# Altium PCB mew-0.2.1-full-tsc.pcbdoc (part 1 of 2)
Units mil, origin at the board's own origin, x right, y up, seen from the top; angles counter-clockwise.
Board outline 3463 x 2680.79 mil, 2 copper layers (Top Layer, Bottom Layer); 49 components, 103 nets, 267 pads, 123 vias.
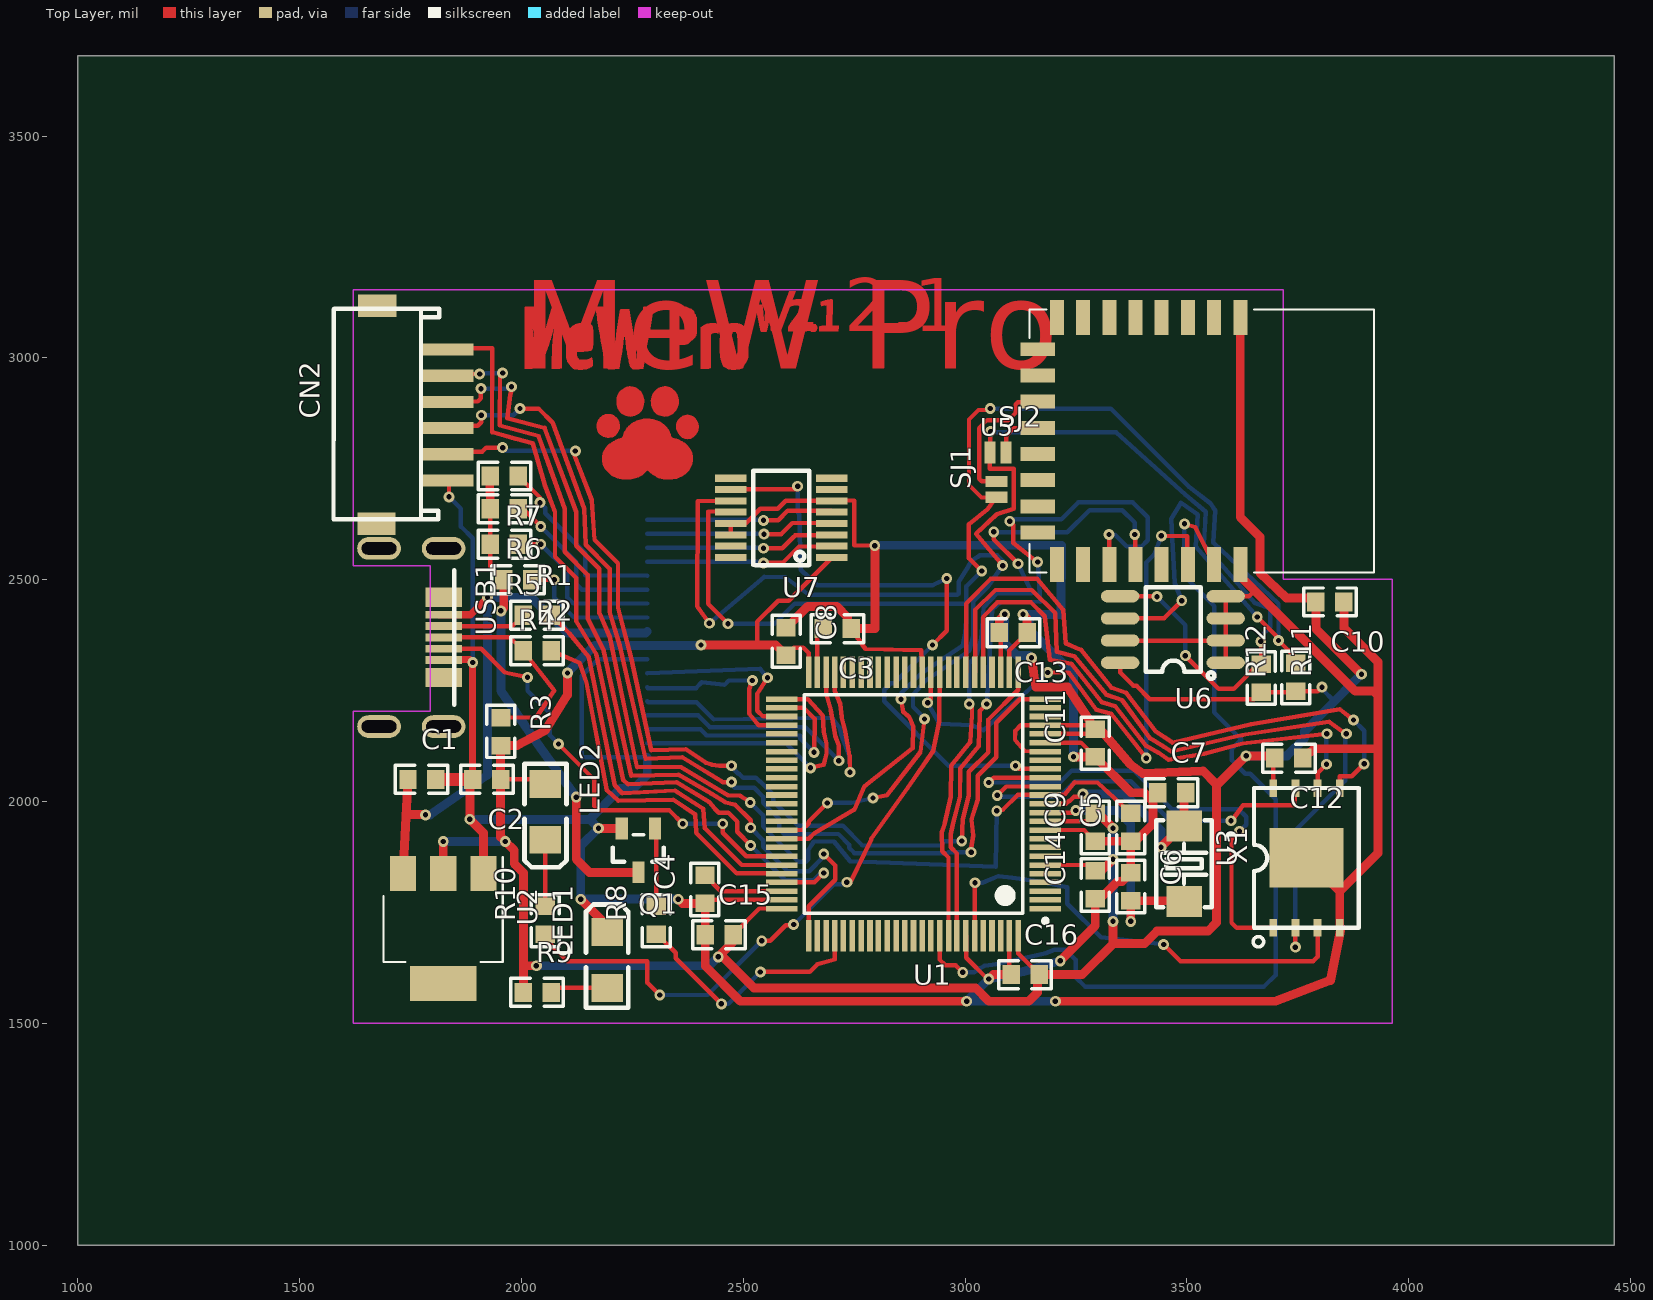
[diagram p0: Top Layer view]
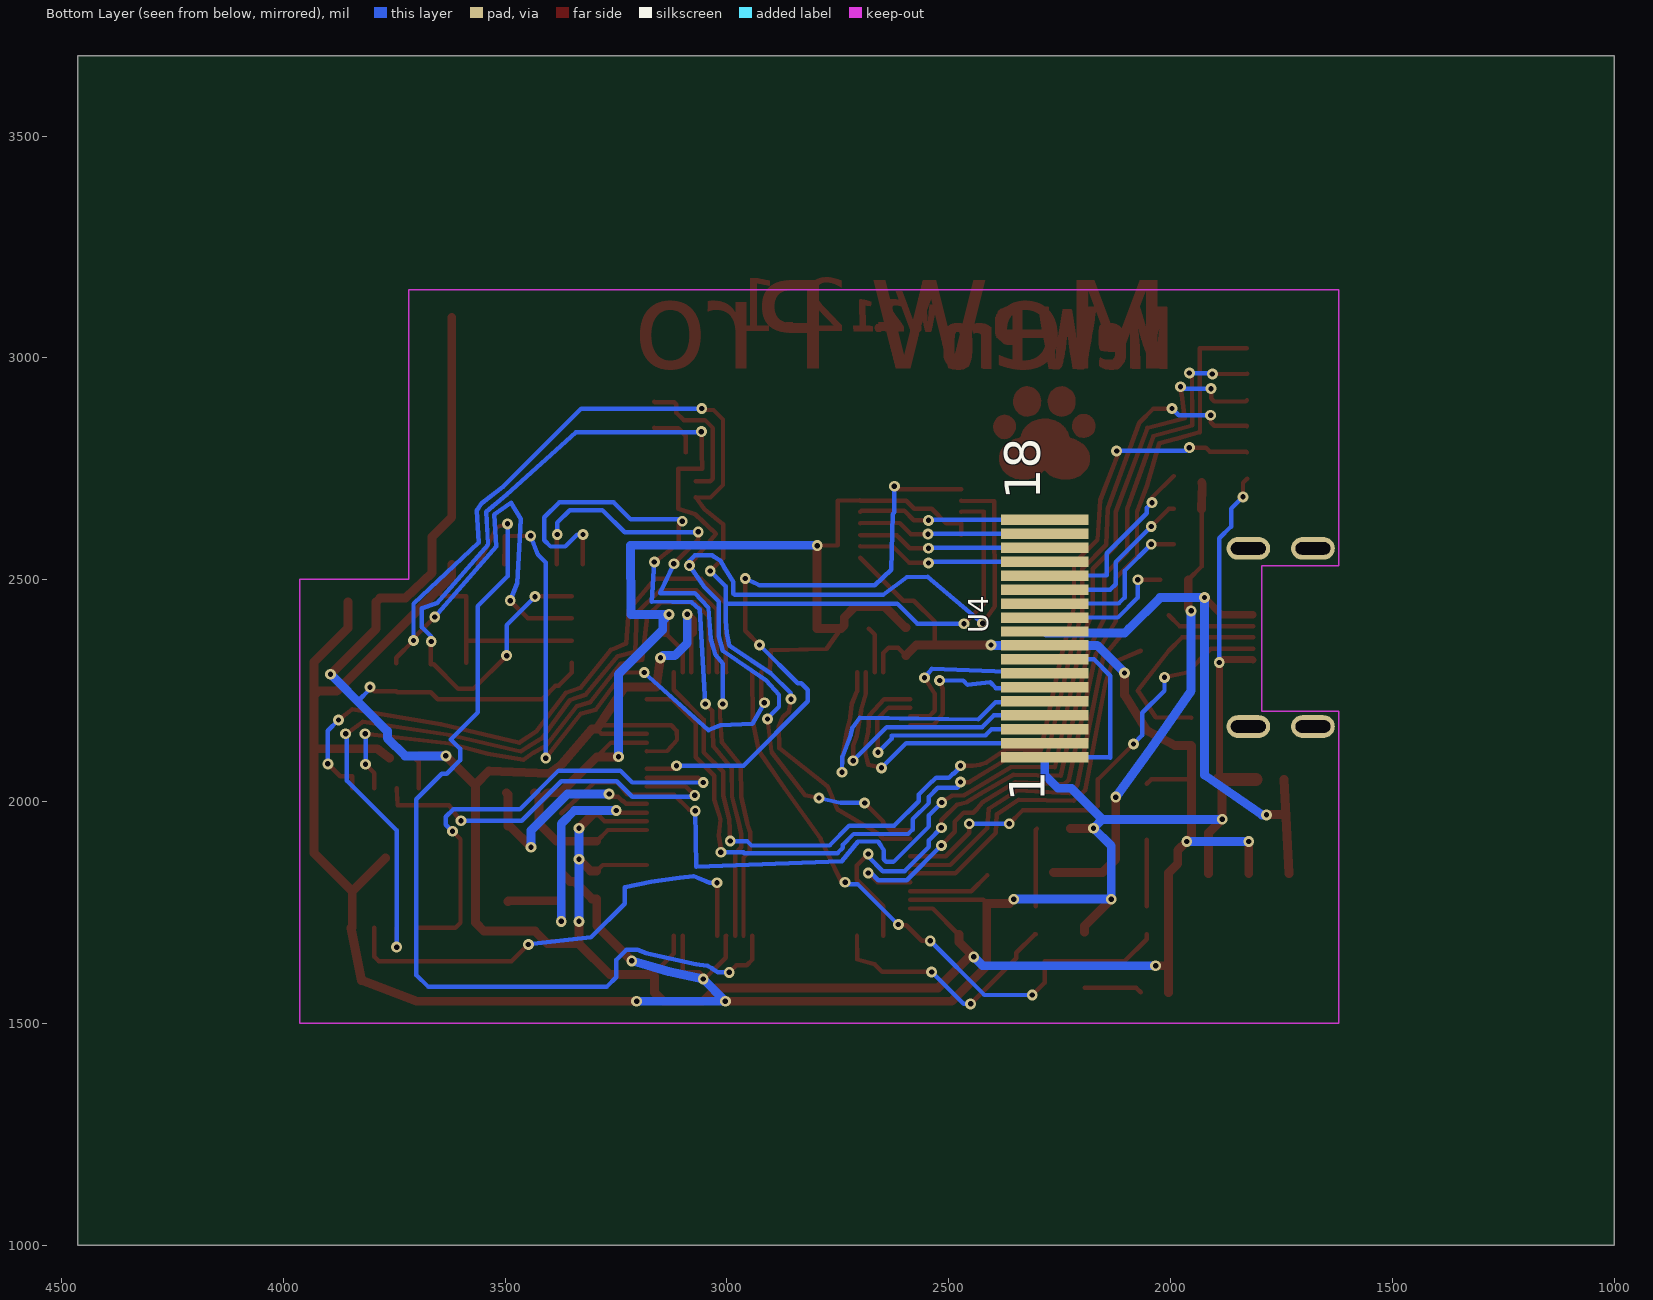
[diagram p1: Bottom Layer view, seen from below]

## Layer stack, top to bottom
Top Layer: signal copper (thickness not stored)
Dielectric: dielectric 12.6, FR-4, Dk 4.8
Bottom Layer: signal copper (thickness not stored)

## Board outline
4463,1000 1000,1000 1000,3680.79 4463,3680.79

## Components (designator, comment, footprint, x,y, rotation, side; value= is the part's Value field where it differs from the comment)
C1 "1u" 0603 1743.5,2049.8 r0 top
C2 "1u" 0603 1953.5,2049.8 r180 top
C3 "2u2" 0603 2743.5,2389.8 r180 top
C4 "2u2" 0603 2413.5,1769.8 r90 top
C5 "0.1u" 0603 3373.5,1909.8 r90 top
C6 "22pf" 0603 3373.5,1839.8 r270 top
C7 "22pf" 0603 3433.5,2019.8 r0 top
C8 "1u" 0603 2596.5,2392.8 r270 top
C9 "1u" 0603 3293.5,1909.8 r90 top
C10 "1u" 0603 3854.5,2449.8 r180 top
C11 "1u" 0603 3293.5,2099.8 r90 top
C12 "1u" 0603 3761.5,2097.8 r180 top
C13 "1u" 0603 3140.5,2380.8 r180 top
C14 "1u" 0603 3293.5,1779.8 r90 top
C15 "1u" 0603 2413.5,1699.8 r0 top
C16 "1u" 0603 3103.5,1609.8 r0 top
CN2 "1.5-6P" 1.5T-6P 1832.5,2782.8 r90 top
LED1 "KT-1206Red LED" LED-1206#1 2183.5,1659.8 r90 top
LED2 "KT-1206Red LED" LED-1206#2 2063.5,1959.8 r270 top
Q1 "2N7002K" SOT-23(SOT-23-3) 2263.5,1839.8 r180 top
R1 "22" 0603 2003.5,2419.8 r0 top
R2 "22" 0603 2003.5,2339.8 r0 top
R3 "1k5" 0603 1953.5,2189.8 r270 top
R4 "55" 0603 2023.5,2499.8 r180 top
R5 "55" 0603 1993.5,2579.8 r180 top
R6 "55" 0603 1993.5,2659.8 r180 top
R7 "55" 0603 1993.5,2733.8 r180 top
R8 "33" 0603 2303.5,1699.8 r90 top
R9 "1k" 0603 2003.5,1569.8 r0 top
R10 "1k" 0603 2053.5,1699.8 r90 top
R11 "1k5" 0603 3667.5,2309.8 r270 top
R12 "1k5" 0603 3745.5,2247.8 r90 top
SJ1 "JUMPER-PAD-2-NO" PAD-JUMPER-2-NO_NO_SILK 3070.5,2703.8 r90 top
SJ2 "JUMPER-PAD-2-NO" PAD-JUMPER-2-NO_NO_SILK 3074.5,2786.8 r0 top
U1 "STM32F437VGT6" STM-LQFP100 2883.6,1999.7 r180 top
U2 "AMS1117-3.3" SOT-223 1823.5,1589.8 r270 top
U3 "W25N01GVZEIG TR" WSON-8X6 3769.5,1872.8 r90 top
U4 "spi tft screen generic 0.8mm pitch smd" "SMD TFT 18PIN 0.8MM" 2283.5,2099.8 r270 bottom
U5 "JDY-08 BLE" JDY-08_HANDSOLDERING 3620.4,3091.2 r180 top
U6 "FM24C16B-GTR" SOIC-8_150MIL 3562.5,2312.8 r180 top
U7 "TSC2007IPWR" TSSOP-16 2587.5,2642.8 r180 top
USB1 "Micro USB-B 5P-Female-SMT_C40940" "MICRO 5P_C40940" 1824.5,2369.8 r270 top
X1 "8MHz" 5032 3493.5,1859.8 r270 top
? "" IMAGE#1 2285.7,2833.82 r0 top
? "v. 2.1" "TrueType Text"#1 2527.47,3060.79 r0 top
? "MeW Pro" "TrueType Text"#1 2000.47,2976.82 r0 top
? "" IMAGE#2 2284.3,2830.89 r0 top
? "MeW Pro" "TrueType Text"#2 2001.47,2975.82 r0 top
? "v. 2.1" "TrueType Text"#3 2526.5,3059.79 r0 top

## Footprints (in the part's own frame and the unit in brackets; to place one, negate y for a bottom-side part, rotate by r counter-clockwise, add the part's x,y. Pads: shape width x height; smd on the part's side, far side on the other; paste and mask are expansions set on the pad)
1.5T-6P [mm]
  rect 0.701x3 smd: 1(-1.502,0.003) 2(0,0) 3(1.499,0) 4(2.987,-0.001) 5(4.497,0.003) 6(5.998,0.003)
  rect 1.3x2.2 smd: 7(8.508,4.007) 8(-3.986,4.049)
  silkscreen extent -3.72,0.46 8.33,6.51
0603 [mm]
  rect 1x1.1 smd: 1(0.015,-0.001) 2(1.615,-0.001)
  silkscreen extent -0.7,-0.8 2.3,0.8
5032 [mil]
  rect 70x80 smd: 1(-85,0) 2(85,0)
  silkscreen extent -98,-63 98,63
IMAGE#1 [mil]
IMAGE#2 [mil]
  Top Layer region: 48.13,-104.98 48.13,-104.98 43.55,-104.94 39.1,-104.68 34.92,-104.21 31.15,-103.52 27.92,-102.6 25.32,-101.63 22.8,-100.58 20.36,-99.43 17.99,-98.19 15.7,-96.87 13.48,-95.45 11.33,-93.94 9.25,-92.33 7.23,-90.63 5.28,-88.84 0.05,-83.82 93.45,-83.82 92.49,-85.25 85.97,-91.84 77.92,-97.48 68.4,-101.99 65.15,-103 61.36,-103.81 57.17,-104.41 52.72,-104.8
  Top Layer region: -47.8,-104.83 -47.8,-104.83 -53.45,-104.62 -58.71,-104.1 -63.63,-103.24 -68.23,-102.04 -72.55,-100.48 -76.64,-98.54 -80.51,-96.21 -84.21,-93.48 -87.78,-90.32 -91.24,-86.73 -93.59,-83.99 -93.72,-83.82 0.05,-83.82 -5.17,-88.84 -8.83,-92.14 -12.51,-95.02 -16.25,-97.49 -20.1,-99.58 -24.1,-101.29 -28.28,-102.65 -32.71,-103.66 -37.4,-104.35 -42.42,-104.74
  Top Layer region: 93.45,-83.82 -93.72,-83.82 -95.62,-81.36 -97.34,-78.78 -98.76,-76.22 -99.92,-73.61 -100.82,-70.92 -101.49,-68.09 -101.94,-65.07 -102.2,-61.82 -102.28,-58.29 -102.2,-54.7 -101.93,-51.4 -101.47,-48.35 -100.77,-45.49 -99.83,-42.76 -98.63,-40.12 -97.13,-37.5 -95.32,-34.85 -93.19,-32.13 -90.69,-29.26 -88.52,-27.06 -86.05,-24.88 -83.34,-22.75 -80.46,-20.72 -77.47,-18.83 -74.43,-17.11 -71.42,-15.6 -68.5,-14.35 -67.06,-13.85 -67.06,-13.85 -65.72,-13.38 -63.16,-12.75 -61.67,-12.44 -60.36,-12.08 -59.22,-11.68 -58.25,-11.24 -57.46,-10.75 -57.21,-10.54 -56.79,-10.19 -56.3,-9.58 -55.94,-8.9 -55.74,-8.17 -55.66,-7.36 -55.49,-6.02 -55.02,-4.31 -54.28,-2.31 -53.33,-0.11 -52.19,2.22 -50.91,4.6 -49.53,6.95 -48.09,9.2 -46.63,11.26 -45.19,13.05 -42.42,16.02 -39.42,18.77 -36.21,21.29 -32.82,23.57 -29.27,25.6 -25.57,27.37 -21.73,28.87 -17.79,30.09 -13.75,31.02 -9.64,31.65 -2.01,32.12 -2.01,32.12 5.41,31.75 12.54,30.57 19.34,28.61 25.73,25.9 31.65,22.47 37.04,18.36 41.84,13.6 45.98,8.21 49.41,2.24 49.81,1.37 50.22,0.45 50.62,-0.51 51.01,-1.49 51.37,-2.48 51.72,-3.44 52.02,-4.37 52.29,-5.25 52.51,-6.05 52.67,-6.76 52.91,-7.79 53.18,-8.64 53.52,-9.35 53.99,-9.94 54.64,-10.45 55.5,-10.9 56.62,-11.33 58.05,-11.76 59.84,-12.22 62.03,-12.75 65.36,-13.63 68.63,-14.7 71.81,-15.95 74.88,-17.36 77.84,-18.93 80.67,-20.65 83.35,-22.51 85.87,-24.5 88.22,-26.62 90.38,-28.85 96.19,-36.68 100.07,-44.9 102.08,-53.33 102.26,-61.77 100.69,-70.03 97.41,-77.92
  Top Layer region: 90.66,-13.85 90.66,-13.85 90.66,-13.85 84.19,-13.22 77.86,-10.54 71.98,-5.61 68.69,-1.22 66.36,3.55 64.97,8.55 64.48,13.65 64.88,18.7 66.14,23.56 68.23,28.1 71.14,32.17 74.85,35.64 77.11,37.01 79.32,38.35 83.47,39.86 87.71,40.55 87.71,40.55 91.94,40.47 96.08,39.66 100.02,38.16 103.69,36.03 106.99,33.29 109.83,30 112.11,26.19 113.76,21.91 115.01,13.93 114.22,6.56 111.71,0.02 107.79,-5.5 102.77,-9.78 96.96,-12.64
  Top Layer region: -86.12,-10.75 -86.12,-10.75 -90.94,-10.74 -95.47,-9.99 -99.66,-8.55 -103.45,-6.47 -106.79,-3.8 -109.63,-0.58 -111.92,3.13 -113.62,7.29 -114.66,11.85 -115.01,16.77 -114.71,19.91 -113.88,23.1 -112.59,26.27 -110.88,29.35 -108.82,32.27 -106.45,34.95 -103.85,37.32 -101.07,39.31 -98.16,40.85 -95.18,41.85 -93.37,42.21 -91.5,42.43 -89.59,42.53 -89.59,42.53 -87.65,42.5 -85.72,42.35 -83.81,42.07 -81.95,41.68 -80.16,41.17 -78.46,40.54 -76.88,39.81 -72.9,37.01 -70.72,35.48 -66.31,30.05 -63.58,23.87 -62.47,17.3 -62.91,10.68 -64.83,4.38 -68.18,-1.27 -72.88,-5.91 -78.89,-9.19
  Top Layer region: -39.39,36.98 -39.39,36.98 -44.61,37.37 -49.47,38.55 -53.94,40.47 -57.97,43.08 -61.5,46.33 -64.49,50.17 -66.9,54.54 -68.68,59.4 -69.78,64.7 -70.16,70.38 -69.91,75.15 -69.16,79.66 -67.94,83.89 -66.25,87.83 -64.12,91.44 -61.55,94.71 -58.55,97.62 -55.16,100.15 -51.37,102.27 -47.2,103.96 -45.59,104.36 -43.67,104.62 -41.51,104.72 -41.51,104.72 -39.2,104.68 -36.8,104.52 -34.39,104.22 -32.05,103.8 -29.83,103.28 -27.83,102.65 -26.11,101.92 -22.8,100.02 -19.8,97.79 -17.11,95.26 -14.75,92.43 -12.72,89.33 -11.03,85.98 -9.71,82.39 -8.75,78.58 -8.16,74.57 -7.97,70.38 -8.36,64.75 -9.49,59.49 -11.31,54.65 -13.78,50.29 -16.84,46.45 -20.45,43.2 -24.56,40.57 -29.12,38.62 -34.08,37.41
  Top Layer region: 38.82,37.01 38.82,37.01 33.82,37.38 29.12,38.46 24.78,40.21 20.83,42.6 17.32,45.57 14.27,49.1 11.74,53.15 9.76,57.66 8.37,62.61 7.61,67.95 7.53,72.68 8.01,77.26 9.02,81.64 10.54,85.79 12.54,89.66 14.99,93.2 17.87,96.38 21.15,99.14 24.81,101.46 28.82,103.27 33.11,104.48 37.46,104.98 37.46,104.98 41.8,104.79 46.07,103.96 50.2,102.52 54.11,100.48 57.75,97.88 61.03,94.76 63.89,91.14 66.25,87.05 67.97,82.95 69.18,78.77 69.89,74.56 70.11,70.34 69.85,66.16 69.1,62.06 67.87,58.09 66.17,54.27 64,50.65 61.37,47.27 59.4,45.16 57.43,43.32 55.45,41.74 53.42,40.42 51.31,39.32 49.12,38.46 46.79,37.81 44.32,37.35 41.67,37.09
JDY-08_HANDSOLDERING [mm]
  rect 0.8x2 smd: 1(0,0) 2(1.5,0) 3(3,0) 4(4.5,0) 5(6,0) 6(7.5,0) 7(9,0) 8(10.5,0) 17(10.5,14.14) 18(9,14.14) 19(7.5,14.14) 20(6,14.14) 21(4.5,14.14) 22(3,14.14) 23(1.5,14.14) 24(0,14.14)
  rect 2x0.8 smd: 9(11.6,1.82) 10(11.6,3.32) 11(11.6,4.82) 12(11.6,6.32) 13(11.6,7.82) 14(11.6,9.32) 15(11.6,10.82) 16(11.6,12.32)
  silkscreen extent -7.66,-0.46 12.06,14.6
LED-1206#1 [mil]
  rect 63x70.9 smd: 1(-80,-10.05) 2(46,-10.05)
  silkscreen extent -125,-57 108,38
LED-1206#2 [mil]
  rect 63x70.9 smd: 1(-80,-9.95) 2(46,-9.95)
  silkscreen extent -125,-57 108,38
"MICRO 5P_C40940" [mm]
  oval 1.3x2.5 hole 0.7 slot 2.001 at 90 deg: 0(-5.1,0) 0(-5.1,-3.701) 0(5.1,0) 0(5.1,-3.701)
  rect 0.45x2.1 smd: 1(-1.302,0.009) 2(-0.652,0.009) 3(0.001,0.009) 4(0.649,0.009) 5(1.299,0.009)
  rect 1.1x2.1 smd: ""(-2.3,0.009) ""(2.3,0.009)
  silkscreen extent -3.84,0.61 3.86,0.61
PAD-JUMPER-2-NO_NO_SILK [mil]
  rect 25x50 smd: 1(-18,0) 2(18,0)
"SMD TFT 18PIN 0.8MM" [mm]
  rect 0.6x5 smd: 1(0,0) 2(-0.8,0) 3(-1.6,0) 4(-2.4,0) 5(-3.2,0) 6(-4,0) 7(-4.801,0) 8(-5.601,0) 9(-6.401,0) 10(-7.2,0) 11(-8,0) 12(-8.8,0) 13(-9.6,0) 14(-10.4,0) 15(-11.2,0) 16(-11.999,0) 17(-12.799,0) 18(-13.599,0)
SOIC-8_150MIL [mm]
  oval 2.2x0.7 smd: 1(-0.635,0) 2(-0.635,-1.27) 3(-0.635,-2.54) 4(-0.635,-3.81) 5(5.41,-3.81) 6(5.41,-2.54) 7(5.41,-1.27) 8(5.41,0)
  silkscreen extent 0.01,-4.32 3.94,0.93
SOT-23(SOT-23-3) [mm]
  rect 0.7x1.25 smd: 1(-0.95,-2.52) 2(0.95,-2.52) 3(0,-0.02)
  silkscreen extent -1.46,-2.17 1.46,-0.62
SOT-223 [mm]
  rect 2x1.5 smd: 1(-6.3,2.3) 2(-6.3,0) 3(-6.3,-2.3)
  rect 2x3.8 smd: 4(0,0)
  silkscreen extent -7.25,-3.41 -1.24,3.41
STM-LQFP100 [mil]
  rect 71.5x12.5 smd: 1(-297.05,241.05) 2(-297.05,221.05) 3(-297.05,202.05) 4(-297.05,182.05) 5(-297.05,162.05) 6(-297.05,143.05) 7(-297.05,123.05) 8(-297.05,103.05) 9(-297.05,84.05) 10(-297.05,64.05) 11(-297.05,44.05) 12(-297.05,25.05) 13(-297.05,5.05) 14(-297.05,-14.95) 15(-297.05,-33.95) 16(-297.05,-53.95) 17(-297.05,-73.95) 18(-297.05,-92.95) 19(-297.05,-112.95) 20(-297.05,-132.95) 21(-297.05,-152.95) 22(-297.05,-171.95) 23(-297.05,-191.95) 24(-297.05,-211.95) 25(-297.05,-230.95) 51(296.95,-230.95) 52(296.95,-211.95) 53(296.95,-191.95) 54(296.95,-171.95) 55(296.95,-152.95) 56(296.95,-132.95) 57(296.95,-112.95) 58(296.95,-92.95) 59(296.95,-73.95) 60(296.95,-53.95) 61(296.95,-33.95) 62(296.95,-14.95) 63(296.95,5.05) 64(296.95,25.05) 65(296.95,44.05) 66(296.95,64.05) 67(296.95,84.05) 68(296.95,103.05) 69(296.95,123.05) 70(296.95,143.05) 71(296.95,162.05) 72(296.95,182.05) 73(296.95,202.05) 74(296.95,221.05) 75(296.95,241.05)
  rect 12.5x71.5 smd: 26(-236.05,-291.95) 27(-216.05,-291.95) 28(-197.05,-291.95) 29(-177.05,-291.95) 30(-157.05,-291.95) 31(-138.05,-291.95) 32(-118.05,-291.95) 33(-98.05,-291.95) 34(-79.05,-291.95) 35(-59.05,-291.95) 36(-39.05,-291.95) 37(-20.05,-291.95) 38(-0.05,-291.95) 39(19.95,-291.95) 40(38.95,-291.95) 41(58.95,-291.95) 42(78.95,-291.95) 43(97.95,-291.95) 44(117.95,-291.95) 45(137.95,-291.95) 46(157.95,-291.95) 47(176.95,-291.95) 48(196.95,-291.95) 49(216.95,-291.95) 50(235.95,-291.95) 76(235.95,302.05) 77(216.95,302.05) 78(196.95,302.05) 79(176.95,302.05) 80(157.95,302.05) 81(137.95,302.05) 82(117.95,302.05) 83(97.95,302.05) 84(78.95,302.05) 85(58.95,302.05) 86(38.95,302.05) 87(19.95,302.05) 88(-0.05,302.05) 89(-20.05,302.05) 90(-39.05,302.05) 91(-59.05,302.05) 92(-79.05,302.05) 93(-98.05,302.05) 94(-118.05,302.05) 95(-138.05,302.05) 96(-157.05,302.05) 97(-177.05,302.05) 98(-197.05,302.05) 99(-216.05,302.05) 100(-236.05,302.05)
  silkscreen extent -302,-241 246,274
"TrueType Text"#1 [mil]
"TrueType Text"#2 [mil]
  Top Layer region: 477.41,-2.01 477.41,-2.01 473.4,-2 471.6,-1.98 469.48,-1.91 467.74,-1.76 466.26,-1.52 464.94,-1.17 463.67,-0.67 462.33,-0.01 460.81,0.83 459.01,1.89 457.22,2.96 455.77,3.88 454.59,4.75 453.63,5.66 452.83,6.7 452.12,7.96 451.46,9.53 450.78,11.49 450.01,13.95 449.29,16.39 505.9,16.39 504.31,13.78 502.11,10.39 499.9,7.03 498.03,4.34 496.34,2.24 494.7,0.67 493.65,-0.01 492.95,-0.46 490.95,-1.22 488.54,-1.68 485.58,-1.91 481.92,-2
  Top Layer region: 130.41,-2.01 130.41,-2.01 126.24,-2 123.03,-1.93 120.34,-1.73 118.14,-1.35 117.14,-1.01 116.29,-0.72 115.04,-0.01 114.65,0.21 113.08,1.52 111.44,3.26 109.6,5.5 107.41,8.29 105.25,11.11 103.51,13.53 102.16,15.77 101.14,18.07 100.71,19.59 158.48,19.59 158.59,18.84 158.7,17.67 158.75,16.68 158.8,14.73 158.81,8.81 158.75,7.53 158.6,6.49 158.3,5.63 157.8,4.9 157.06,4.25 156.04,3.61 154.67,2.95 152.91,2.19 150.71,1.29 148.51,0.39 147.46,-0.01 146.66,-0.32 145.06,-0.88 144.6,-1.01 143.58,-1.3 142.1,-1.6 140.5,-1.8 138.65,-1.92 136.6,-1.98 134.79,-2
  Top Layer region: 253.61,-1.21 253.61,-1.21 250.98,-1.17 250.15,-1.11 249.44,-0.98 248.89,-0.81 248.33,-0.52 247.79,-0.11 247.22,0.43 246.58,1.12 245.81,1.99 245.05,2.86 244.44,3.6 243.94,4.26 243.54,4.89 243.21,5.56 242.93,6.32 242.68,7.23 242.42,8.34 242.14,9.71 241.81,11.39 240.78,16.39 240.11,19.59 239.49,22.59 276.89,22.59 276.37,19.59 273.01,-0.01 271.49,-0.17 270.25,-0.31 269.22,-0.41 268.37,-0.5 267.45,-0.59 266.42,-0.67 265.31,-0.76 264.36,-0.83 263.21,-0.91 262.19,-0.98 261.12,-1.06 260.31,-1.11 259.58,-1.15 258.12,-1.19
  Top Layer region: 197.61,-1.01 197.61,-1.01 195.54,-0.98 194.61,-0.89 194.06,-0.76 193.58,-0.57 193.1,-0.28 192.6,0.16 192.07,0.73 191.45,1.47 190.71,2.39 189.98,3.32 189.39,4.09 188.91,4.77 188.52,5.41 188.2,6.06 187.93,6.78 187.68,7.62 187.42,8.63 187.14,9.87 186.81,11.39 185.67,16.91 185.12,19.59 184.71,21.6 184.51,22.59 222.58,22.59 218.81,-0.01 216.15,-0.28 213.94,-0.5 212.07,-0.67 210.4,-0.8 208.81,-0.89 207.18,-0.95 205.38,-0.98 203.26,-1
  Top Layer region: 158.48,19.59 135.81,19.59 138.43,19.59 140.59,19.63 142.43,19.74 144.08,19.95 145.66,20.29 147.31,20.8 149.13,21.51 151.28,22.46 153.86,23.67 157.01,25.19 157.01,25.19 157.5,23.55 157.89,22.19 158.2,21.01 158.35,20.29
  Top Layer region: 332.21,-0.01 332.21,-0.01 332.21,53.99 354.41,53.99 354.41,6.06 354.39,2.52 354.25,1.89 353.98,1.52 353.7,1.29 353.46,1.12 353.14,0.9 352.71,0.67 352.28,0.53 351.63,0.43 350.55,0.34 349.61,0.29 348.41,0.24 346.91,0.19 345.41,0.13 344.16,0.09 343.05,0.06 342.01,0.03 339.78,0
  Top Layer region: 135.81,19.59 100.71,19.59 100.41,20.63 99.93,23.68 99.63,27.43 99.48,32.13 99.42,37.97 99.43,52.84 99.45,55.59 160.06,55.59 160.03,55.04 159.86,52.79 159.61,50.73 159.25,48.69 158.78,46.5 158.17,43.99 157.41,40.99 154.3,40.34 151.66,39.81 149.29,39.4 146.98,39.08 144.51,38.84 141.69,38.66 138.3,38.52 134.12,38.4 128.97,38.3 122.61,38.19 122.78,35.42 122.93,33.18 123.08,31.37 123.26,29.92 123.49,28.74 123.78,27.73 124.16,26.82 124.64,25.92 125.25,24.94 126.01,23.79 126.78,22.65 127.44,21.74 128.04,21.03 128.66,20.5 129.34,20.11 130.15,19.86 131.14,19.7 132.2,19.63 133.84,19.59
  Top Layer region: 50.81,33.39 41.61,33.39 34.16,55.59 32.21,61.39 31.45,63.69 30.79,65.72 30.19,67.69 29.57,69.82 29.47,70.19 65.51,70.19 65.28,69.39 64.65,67.31 64.04,65.43 63.38,63.53 62.61,61.39 60.52,55.59 53.06,34.91 52.95,34.56 52.8,34.11 52.7,33.87 52.47,33.59 52.01,33.43
  Top Layer region: 356.01,53.99 332.21,53.99 332.21,74.59 392.17,74.59 391.7,73.42 390.34,71.23 388.54,69.07 386.21,66.72 383.31,63.99 380.4,61.28 377.96,59.11 375.84,57.42 373.86,56.15 372.64,55.59 371.88,55.24 369.71,54.63 367.21,54.26 364.2,54.07 360.52,54
  Top Layer region: 402.61,-0.01 402.61,-0.01 402.61,80.79 434.21,80.79 433.06,80.78 432.15,80.69 431.51,80.53 431,80.38 430.47,80.21 429.81,79.99 429.16,79.77 428.73,79.62 428.24,79.44 427.8,79.26 427.47,79.09 427.14,78.89 426.79,78.66 426.41,78.38 425.96,78.02 425.41,77.59 425.35,55.59 425.26,19.59 425.22,5.66 425.19,2.52 425.05,1.89 424.78,1.52 424.5,1.29 424.26,1.12 423.94,0.9 423.51,0.67 423.08,0.53 422.43,0.43 421.35,0.34 420.41,0.29 419.21,0.24 417.71,0.19 416.21,0.13 414.95,0.09 413.84,0.06 411.7,0.01 409.07,-0.01
  Top Layer region: 441.61,79.19 441.61,79.19 440.74,79.62 440.02,79.97 439.4,80.24 438.84,80.44 438.29,80.59 437.69,80.69 436.51,80.77 434.21,80.79 442.18,80.79 442.18,80.79
  Top Layer region: 160.06,55.59 122.61,55.59 128.11,55.6 130.08,55.64 131.64,55.7 132.89,55.81 133.92,55.98 134.81,56.21 135.67,56.51 136.57,56.9 137.61,57.39 137.88,58.21 138.1,58.91 138.27,59.56 138.4,60.21 138.49,61.01 138.57,62.28 138.61,64.66 138.6,72.71 138.55,74.63 138.47,75.84 138.39,76.51 138.27,77.19 138.13,77.74 137.9,78.4 137.59,79.09 137.21,79.89 136.83,80.67 136.5,81.3 136.19,81.79 135.86,82.16 135.49,82.43 135,82.61 134.48,82.71 133.78,82.77 131.81,82.79 160.07,82.79 160.07,82.79 160.18,78.58 160.2,73.91 160.21,65.72 160.19,60.81 160.14,57.66
  Top Layer region: 122.61,55.59 99.45,55.59 99.48,57.66 99.54,60.51 99.71,63.87 100,66.71 100.43,69.25 101.03,71.7 101.82,74.26 102.84,77.15 103.6,79.19 104.11,80.59 104.94,82.79 104.94,82.79 131.81,82.79 131.27,82.79 129.55,82.74 128.74,82.61 128.07,82.37 127.53,81.96 127.05,81.36 126.62,80.53 126.26,79.62 126.1,79.19 125.69,77.98 125.11,76.19 124.54,74.39 124.09,72.86 123.72,71.47 123.44,70.12 123.23,68.66 123.06,66.99 122.93,64.97 122.83,62.47 122.72,59.39
  Top Layer region: 478.01,16.39 449.29,16.39 449.11,16.99 448.35,19.59 448.2,20.11 447.5,22.63 446.95,24.94 446.53,27.18 446.23,29.54 446.03,32.22 445.9,35.43 445.84,39.36 445.82,44.22 445.83,55.24 445.85,64.23 446.08,75.47 446.61,82.79 446.66,83.59 478.21,83.59 477.85,83.59 476.34,83.53 475.66,83.41 475.1,83.15 474.63,82.74 474.2,82.12 473.8,81.26 473.62,80.79 473.37,80.11 473.07,79.19 472.89,78.63 472.31,76.79 471.74,74.93 471.29,73.31 470.93,71.79 470.67,70.2 470.48,68.39 470.35,66.19 470.28,63.87 470.25,61.4 470.22,57.66 470.22,45.72 470.24,40.73 470.27,38.16 470.33,36.35 470.41,34.77 470.52,33.29 470.67,31.77 470.87,30.08 471.11,28.09 471.36,26.11 471.57,24.51 471.75,23.23 471.92,22.22 472.1,21.43 472.3,20.78 472.54,20.23 472.83,19.72 473.18,19.19 473.61,18.59 474.05,17.99 474.42,17.52 474.71,17.18 475,16.91 475.34,16.68 475.7,16.54 476.12,16.45 476.63,16.41
  Top Layer region: 505.9,16.39 478.01,16.39 479.61,16.45 480,16.54 480.31,16.68 480.63,16.91 480.9,17.18 481.21,17.57 481.58,18.07 482.01,18.69 482.45,19.32 482.8,19.87 483.09,20.4 483.34,20.97 483.55,21.64 483.75,22.46 483.95,23.5 484.16,24.81 484.41,26.45 484.71,28.49 485.01,30.54 485.25,32.26 485.44,33.81 485.58,35.29 485.68,36.85 485.74,38.62 485.78,40.73 485.81,44.43 485.8,59.28 485.77,62.47 485.72,64.43 485.67,65.89 485.6,67.11 485.51,68.4 485.38,70 485.21,71.89 485.05,73.76 484.91,75.28 484.78,76.49 484.64,77.45 484.49,78.23 484.31,78.87 484.08,79.43 483.8,79.96 483.45,80.53 483.01,81.19 482.58,81.84 482.21,82.36 481.88,82.77 481.55,83.07 481.21,83.29 480.8,83.44 480.23,83.53 479.08,83.59 478.21,83.59 506.43,83.59 506.67,82.79 506.91,81.99 507.81,78.99 508.52,76.46 509.08,74.22 509.5,72.09 509.8,69.86 510,67.37 510.12,64.43 510.18,61.4 510.2,58.21 510.21,43.33 510.15,37.13 510,32.13 509.7,28.09 509.2,24.76 508.46,21.92 507.44,19.3 506.07,16.68
  Top Layer region: 222.58,22.59 206.61,22.59 206.78,29.23 206.94,34.72 207.13,39.36 207.37,43.47 207.69,47.36 208.13,51.35 208.69,55.59 208.81,56.42 209.46,60.82 210.42,66.94 211.61,74.39 212.64,80.79 212.96,82.79 213.31,84.99 230.61,84.99 230.39,82.79 230.18,80.79 230.01,79.19 229.58,75 228.74,66.91 228.05,60.42 227.48,55.2 226.99,50.96 226.54,47.39 226.09,44.17 225.62,41.01 225.07,37.58 224.41,33.59
  Top Layer region: 257.41,22.59 239.49,22.59 237.21,33.59 236.4,37.69 235.72,41.2 235.15,44.43 234.63,47.68 234.14,51.26 233.63,55.49 233.06,60.67 232.39,67.11 231.59,75.11 231.19,79.19 231.03,80.79 230.83,82.79 230.61,84.99 249.76,84.99 250.15,82.79 250.5,80.79 250.78,79.19 251.61,74.39 252.54,69.05 253.29,64.57 253.91,60.64 254.43,56.96 254.6,55.59 254.89,53.21 255.31,49.09 255.75,44.27 256.22,38.46 256.76,31.33
  Top Layer region: 65.51,70.19 48.21,70.19 48.32,70.92 48.45,71.64 48.58,72.34 48.69,72.86 48.82,73.47 49.03,74.44 49.29,75.67 49.61,77.19 49.94,78.71 50.22,79.98 50.4,80.79 50.53,81.36 50.7,82.04 50.89,82.79 51.05,83.38 51.21,83.99 51.54,85.11 51.93,86.43 52.42,88.03 53.01,89.99 55.59,98.59 72.81,98.59 70.81,90.61 69.18,84.18 68.83,82.79 67.88,79.06 66.83,75.04 65.99,71.89
  Top Layer region: 6.01,-0.01 6.01,-0.01 6.01,98.59 22.41,98.59 21.81,98.19 21.86,97.91 22,97.18 22.11,96.52 22.21,95.93 22.33,95.23 22.47,94.34 22.65,93.2 22.88,91.76 23.16,89.94 23.51,87.69 23.87,85.43 24.15,83.59 24.27,82.79 24.4,81.88 24.62,80.34 24.81,78.78 25.01,77.07 25.22,75.09 25.47,72.7 25.76,69.77 26.11,66.19 26.47,62.6 26.75,59.63 26.97,57.13 27.13,54.92 27.25,52.84 27.33,50.73 27.37,48.69 27.4,45.72 27.41,38.59 27.74,19.59 27.98,6.06 28.01,3.61 27.94,2.24 27.75,1.78 27.49,1.52 27.15,1.29 26.87,1.12 26.48,0.9 26.35,0.83 25.99,0.67 25.53,0.53 24.87,0.43 23.79,0.34 22.86,0.29 21.68,0.24 20.21,0.19 18.74,0.13 17.51,0.09 16.43,0.06 15.42,0.03 13.26,0
  Top Layer region: 48.21,70.19 29.47,70.19 28.89,72.34 28.08,75.47 27.09,79.44 26.76,80.79 26.27,82.79 25.85,84.47 24.31,90.78 22.41,98.59 40.17,98.59 42.81,90.39 43.52,88.32 44.09,86.64 44.56,85.24 44.94,84.07 45.18,83.29 45.32,82.79 45.53,82.07 45.79,81.07 46.06,79.98 46.36,78.71 46.71,77.19 47.07,75.67 47.35,74.44 47.57,73.47 47.71,72.86 47.84,72.3 47.97,71.64 48.11,70.92
  Top Layer region: 66.61,-0.01 66.61,-0.01 67.12,19.59 67.61,38.39 67.72,42.25 67.82,45.42 67.91,48.08 68.01,50.37 68.13,52.48 68.27,54.55 68.45,56.77 68.68,59.28 68.96,62.27 69.31,65.89 69.67,69.5 69.96,72.45 70.2,74.85 70.41,76.85 70.6,78.58 70.79,80.15 70.99,81.71 71.14,82.79 71.25,83.59 71.49,85.3 71.81,87.59 72.14,89.87 72.4,91.71 72.61,93.17 72.78,94.32 72.91,95.21 73.02,95.93 73.12,96.52 73.23,97.18 73.36,97.91 73.41,98.19 72.81,98.59 89.41,98.59 89.41,6.06 89.39,2.52 89.25,1.89 88.98,1.52 88.7,1.29 88.41,1.09 88.03,0.83 87.7,0.67 87.27,0.53 86.61,0.43 85.52,0.34 84.55,0.29 83.33,0.24 81.81,0.19 80.29,0.13 79,0.09 77.88,0.06 75.71,0.01 73.07,-0.01
  Top Layer region: 160.07,82.79 104.94,82.79 105.4,84.01 106.47,86.77 107.41,88.99 108.29,90.75 109.18,92.16 110.15,93.33 111.29,94.36 112.67,95.34 114.35,96.38 116.41,97.59 118.48,98.78 120.21,99.74 121.69,100.48 123.05,101.04 124.39,101.44 125.82,101.71 127.44,101.87 129.38,101.95 131.73,101.98 134.61,101.99 134.61,101.99 141.55,101.96 147.11,101.73 151.43,101.11 154.68,99.9 157.01,97.91 158.58,94.95 159.52,90.81 160.01,85.3
  Top Layer region: 442.18,80.79 402.61,80.79 402.61,92.99 406.31,95.43 409.36,97.38 411.93,98.9 414.19,100.04 416.29,100.86 418.41,101.41 420.72,101.75 423.38,101.92 426.55,101.98 430.41,101.99 430.41,101.99 434.24,101.97 435.61,101.93 436.71,101.84 437.59,101.7 438.32,101.49 438.96,101.2 439.59,100.81 440.25,100.31 441.01,99.69 441.77,99.06 442.38,98.52 442.85,98.03 443.21,97.54 443.46,97 443.63,96.38 443.74,95.6 443.79,94.64 443.8,89.34 443.76,87.59 443.67,86.42 443.54,85.44 443.34,84.47 443.06,83.44 442.69,82.27 442.36,81.3
  Top Layer region: 506.43,83.59 446.66,83.59 446.76,84.47 447.94,90.8 449.96,95.51 452.99,98.67 457.2,100.59 462.81,101.57 470.02,101.94 479.01,101.99 479.01,101.99 481.99,101.98 484.53,101.95 486.55,101.87 488.22,101.7 489.65,101.43 490.94,101.02 492.21,100.45 493.55,99.68 495.09,98.71 496.91,97.49 498.73,96.26 500.21,95.2 501.4,94.24 502.38,93.26 503.19,92.18 503.9,90.9 504.56,89.34 505.25,87.39 506.01,84.97
  Top Layer region: 354.41,74.59 332.21,74.59 332.21,120.79 354.41,120.79
  Top Layer region: 392.17,74.59 358.61,74.59 360.03,74.59 361.17,74.63 362.1,74.74 362.86,74.95 363.49,75.29 364.04,75.8 364.57,76.51 365.1,77.46 365.7,78.67 366.41,80.19 367.12,81.72 367.57,82.79 367.77,83.29 368.12,84.29 368.45,85.59 368.69,87.06 368.85,88.84 368.94,91.06 368.99,93.83 369.01,98.9 369.01,104.89 368.99,106.67 368.96,108.15 368.88,109.57 368.75,110.75 368.56,111.78 368.29,112.74 367.94,113.72 367.48,114.81 366.91,116.09 366.34,117.36 365.85,118.38 365.4,119.18 364.96,119.77 364.48,120.2 363.91,120.49 363.22,120.66 362.37,120.75 360.01,120.79 391.06,120.79 391.76,119.27 392.5,117.44 393.06,115.71 393.46,113.91 393.73,111.91 393.9,109.54 393.98,106.67 394.01,103.13 394,92.06 393.93,86.61 393.73,82.23 393.33,78.71 392.68,75.84
  Top Layer region: 249.76,84.99 213.31,84.99 220.21,127.99 220.32,128.91 220.42,129.66 220.5,130.26 220.59,130.74 220.69,131.13 220.8,131.45 220.95,131.74 221.19,132.11 221.34,132.33 221.61,132.69 221.89,133.04 222.13,133.32 222.35,133.54 222.76,133.78 223.2,133.91 224.14,133.98 225.61,133.99 241.21,133.99
  Top Layer region: 89.41,98.59 55.59,98.59 66.81,135.99 67.03,136.64 67.21,137.17 67.39,137.67 67.58,138.15 67.74,138.45 67.97,138.78 68.23,139.1 68.51,139.41 68.82,139.71 69.22,139.91 70.39,139.99 70.81,139.99 89.41,139.99
  Top Layer region: 276.89,22.59 259.01,22.59 259.29,29.55 259.53,35.29 259.77,40.12 260.04,44.34 260.36,48.26 260.77,52.21 261.18,55.59 261.29,56.48 261.95,61.4 262.78,67.26 263.81,74.39 264.74,80.79 265.03,82.79 272.41,133.99 272.52,134.91 272.62,135.71 272.73,136.39 272.8,136.79 272.97,137.36 273.16,137.77 273.41,138.15 273.63,138.45 273.89,138.78 274.13,139.1 274.41,139.41 274.74,139.68 275.24,139.88 276.07,139.97 277.61,139.99 297.01,139.99 287.21,82.79 282.55,55.59
  Top Layer region: 40.17,98.59 6.01,98.59 6.02,136.79 6.08,138.07 6.25,138.6 6.53,138.93 6.87,139.19 7.18,139.41 7.52,139.63 7.93,139.84 8.67,139.97 10.01,139.99 26.81,139.99
  Top Layer region: 205.01,22.59 184.51,22.59 183.86,25.85 183.06,30.04 182.24,34.56 181.33,39.8 180.26,46.14 178.96,53.96 178.69,55.59 177.37,63.64 174.56,80.79 174.24,82.79 169.62,111.02 168.81,115.91 168.16,119.93 167.59,123.41 167.04,126.71 165.81,134.19 165.68,134.91 165.61,136.39 165.67,138.15 165.86,138.63 166.18,138.93 166.56,139.19 166.9,139.41 167.27,139.63 167.74,139.83 168.39,139.94 170,139.99 170.81,139.99 189.41,139.99 198.13,82.79 198.44,80.79 199.41,74.39 200.55,67.05 201.47,61.01 202.15,56.42 202.26,55.59 202.8,51.63 203.26,47.66 203.65,43.76 203.98,39.61 204.3,34.91 204.63,29.34
  Top Layer region: 391.06,120.79 332.21,120.79 332.22,136.79 332.29,137.92 332.47,138.41 332.73,138.76 333.02,139.1 333.3,139.41 333.6,139.68 334.07,139.89 335.1,139.98 336.21,139.99 355.01,139.99 358.65,139.99 361.62,139.96 364.04,139.89 366.06,139.76 367.79,139.54 369.37,139.21 370.93,138.75 372.61,138.15 374.52,137.36 376.81,136.39 379.09,135.4 380.95,134.56 382.45,133.78 383.68,132.99 384.71,132.11 385.63,131.08 386.5,129.8 387.4,128.21 388.41,126.23 389.61,123.79 390.81,121.33
"TrueType Text"#3 [mil]
  Top Layer region: 114.51,0.01 74.81,0.01 74.67,0.4 74.5,0.94 74.36,1.62 74.31,3.39 74.34,6.35 74.42,7.14 74.52,7.72 74.67,8.37 74.81,8.91 74.97,9.43 75.12,9.87 75.26,10.26 75.46,10.74 75.67,11.18 75.83,11.5 76.08,11.96 76.39,12.51 117.51,12.51 117.51,11.72 117.48,7.91 117.42,6.41 117.34,5.3 117.26,4.25 117.18,3.39 117.08,2.59 116.94,2.06 116.76,1.62 116.58,1.26 116.41,0.94 116.2,0.58 115.95,0.25 115.64,0.09
  Top Layer region: 185.31,0.01 145.21,0.01 145.1,1.24 145.01,2.3 144.93,3.39 144.85,4.62 144.81,6.95 144.84,9.8 144.94,10.26 145.15,10.63 145.25,10.74 145.57,10.95 146.01,11.13 146.6,11.31 147.36,11.5 148.31,11.72 149.24,11.93 150.04,12.11 150.77,12.24 151.52,12.34 152.35,12.41 153.33,12.46 154.53,12.49 157.9,12.51 160.21,12.51 188.21,12.51 188.21,12.34 188.19,7.72 188.13,6.23 188.05,5.13 187.98,3.94 187.91,2.8 187.79,2.06 187.6,1.62 187.4,1.26 187.21,0.94 187.01,0.58 186.75,0.25 186.45,0.09
  Top Layer region: 188.21,12.51 180.81,12.51 183.44,12.54 184.8,12.59 185.93,12.67 186.84,12.75 187.75,12.84 188.21,12.91 188.21,12.91
  Top Layer region: 117.51,12.51 101.21,12.51 105.59,12.54 107.21,12.59 108.3,12.67 109.17,12.75 110.06,12.84 111.02,12.95 112.41,13.12 113.79,13.28 114.9,13.41 115.78,13.51 116.41,13.59 117.18,13.7 117.51,13.82 117.51,13.82
  Top Layer region: 17.01,-0.59 17.01,-0.59 14.95,-0.54 14.21,-0.42 13.63,-0.2 13.17,0.16 12.8,0.71 12.48,1.47 12.18,2.49 11.87,3.79 11.51,5.41 9.78,13.91 29.59,13.91 26.81,0.01 25.85,-0.15 25.05,-0.28 24.58,-0.34 23.95,-0.42 22.96,-0.51 22.38,-0.54 21.24,-0.57
  Top Layer region: 131.31,-0.88 131.31,-0.88 128.93,-0.86 128.08,-0.82 127.39,-0.72 126.83,-0.57 126.42,-0.38 126.06,-0.15 125.67,0.19 125.23,0.65 124.71,1.22 124.19,1.79 123.78,2.28 123.46,2.71 123.22,3.14 123.04,3.64 122.92,4.25 122.84,5.3 122.85,9.87 122.96,10.72 123.1,11.18 123.31,11.62 123.6,12.08 123.99,12.57 124.49,13.13 125.11,13.82 125.74,14.49 126.26,15.03 126.73,15.46 127.16,15.78 127.61,16 128.1,16.16 128.8,16.26 130.38,16.31 131.31,16.32 131.31,16.32 133.07,16.3 134.32,16.26 134.97,16.17 135.5,16.04 135.95,15.84 136.37,15.56 136.8,15.19 137.26,14.71 137.81,14.12 138.32,13.51 138.74,13.01 139.06,12.56 139.3,12.12 139.45,11.72 139.58,11.18 139.67,10.26 139.71,8.21 139.67,5.63 139.57,4.77 139.43,4.25 139.23,3.81 138.95,3.35 138.58,2.86 138.11,2.3 137.51,1.62 136.88,0.94 136.36,0.39 135.89,-0.03 135.46,-0.34 135.06,-0.55 134.51,-0.72 133.93,-0.82 133.23,-0.86
  Top Layer region: 43.71,-0.88 43.71,-0.88 41.33,-0.86 40.48,-0.82 39.79,-0.72 39.23,-0.57 38.82,-0.38 38.46,-0.15 38.07,0.19 37.63,0.65 37.11,1.22 36.59,1.79 36.18,2.28 35.86,2.71 35.62,3.14 35.44,3.64 35.32,4.25 35.24,5.3 35.25,9.87 35.36,10.72 35.5,11.18 35.71,11.62 36,12.08 36.39,12.57 36.89,13.13 37.51,13.82 38.14,14.49 38.66,15.03 39.13,15.46 39.56,15.78 40.01,16 40.5,16.16 41.2,16.26 42.78,16.31 43.71,16.32 43.71,16.32 45.47,16.3 46.72,16.26 47.36,16.17 47.9,16.04 48.35,15.84 48.77,15.56 49.2,15.19 49.66,14.71 50.21,14.12 50.72,13.51 51.14,13.01 51.46,12.56 51.7,12.12 51.85,11.72 51.98,11.18 52.07,10.26 52.11,8.21 52.07,5.63 51.97,4.77 51.83,4.25 51.63,3.81 51.35,3.35 50.98,2.86 50.51,2.3 49.91,1.62 49.28,0.94 48.76,0.39 48.29,-0.03 47.86,-0.34 47.46,-0.55 46.91,-0.72 46.33,-0.82 45.63,-0.86
  Top Layer region: 174.11,12.51 160.21,12.51 160.3,16.32 161.31,58.41 175.28,58.41 174.21,16.32
  Top Layer region: 149.81,57.01 149.81,57.01 149.24,58 149,58.41 161.31,58.41 160.22,58.39 158.59,58.34 157.4,58.26 156.52,58.17 155.65,58.06 154.91,57.95 154.01,57.82 153.55,57.73 152.91,57.62 152.19,57.48 151.54,57.37 151.01,57.26 150.44,57.15
  Top Layer region: 78.21,55.51 78.21,55.51 77.78,56.55 77.43,57.42 77.16,58.17 76.95,58.88 76.87,59.32 94.11,59.32 93.16,59.31 91.43,59.27 90.45,59.18 89.8,59.08 89.06,58.94 88.18,58.75 87.11,58.51 85.81,58.22 84.51,57.92 83.44,57.67 82.58,57.45 81.87,57.25 81.26,57.05 80.71,56.84 80.18,56.6 79.61,56.3 78.97,55.95
  Top Layer region: 92.01,12.51 76.39,12.51 76.61,12.91 76.87,13.36 77.41,14.32 78.56,16.3 79.53,17.97 80.4,19.41 81.25,20.75 82.16,22.09 83.2,23.55 84.45,25.23 85.98,27.24 87.87,29.7 90.21,32.72 91.76,34.67 93.01,36.26 94.02,37.57 94.84,38.65 95.52,39.58 96.11,40.43 96.65,41.26 97.19,42.16 97.8,43.19 98.51,44.41 99.24,45.61 99.83,46.59 100.28,47.41 100.63,48.12 100.87,48.76 101.04,49.4 101.14,50.07 101.19,50.83 101.19,54.34 101.12,55.12 101.03,55.51 100.85,55.95 100.61,56.3 100.35,56.6 100.1,56.84 99.75,57.15 99.21,57.62 98.69,58.08 98.29,58.41 97.93,58.69 97.53,58.94 97.11,59.11 96.45,59.24 95.4,59.31 94.11,59.32 116.47,59.32 116.48,59.21 116.51,56.01 116.48,51.9 116.42,50.69 116.3,49.65 116.11,48.72 115.82,47.8 115.41,46.84 114.87,45.75 114.18,44.47 113.31,42.91 112.46,41.36 111.74,40.06 111.08,38.93 110.43,37.87 109.72,36.8 108.9,35.64 107.89,34.28 106.65,32.65 105.11,30.66 103.21,28.22 101.15,25.53 99.47,23.34 98.12,21.55 97.02,20.08 96.11,18.83 95.32,17.7 94.58,16.59 94.4,16.32 93.83,15.42 92.99,14.1
  Top Layer region: 20.41,13.91 9.78,13.91 9.29,16.32 1.21,56.01 1.1,56.84 1.01,57.92 1.1,58.75 1.42,59.06 1.9,59.27 2.31,59.42 2.86,59.59 3.42,59.69 4.31,59.77 4.94,59.81 5.73,59.86 6.71,59.91 8.51,59.96 10.53,60 15.71,60.01 15.71,60.01 18.01,42.62 18.23,40.84 18.41,39.37 18.56,38.09 18.69,36.9 18.81,35.73 18.93,34.46 19.06,33 19.21,31.25 19.39,29.12 19.61,26.51 19.8,23.91 19.95,21.81 20.07,20.13 20.16,18.83 20.22,17.97 20.29,16.89 20.35,15.56
  Top Layer region: 29.59,13.91 20.61,13.91 20.68,15.03 20.77,16.25 20.81,16.89 20.89,17.97 20.95,18.83 21.04,20.16 21.17,21.86 21.51,26.62 21.7,29.22 21.86,31.35 21.99,33.1 22.11,34.56 22.22,35.83 22.34,37 22.46,38.19 22.61,39.47 22.79,40.94 23.01,42.72 24.71,57.32 24.85,58 24.99,58.55 25.21,58.95 25.53,59.24 25.8,59.42 26.15,59.59 26.78,59.73 27.53,59.81 28.06,59.86 28.71,59.91 29.99,59.96 31.85,60 38.81,60.01 38.81,60.01 38.81,60.01 30.07,16.32
  Top Layer region: 116.47,59.32 76.87,59.32 76.76,60.01 76.68,60.81 76.62,62.36 76.64,66.31 76.75,66.99 76.86,67.27 77.08,67.61 77.43,67.93 78.03,68.27 78.87,68.63 79.99,69.02 81.42,69.47 83.21,70.01 85.03,70.56 86.55,70.99 87.84,71.33 88.99,71.58 90.11,71.76 91.27,71.89 92.57,71.96 94.53,72 98.21,72.01 98.21,72.01 100.87,72.01 103.03,71.98 104.76,71.9 106.17,71.75 107.32,71.49 108.31,71.11 109.22,70.57 110.13,69.86 111.13,68.95 112.31,67.82 113.45,66.67 114.36,65.7 115.07,64.83 115.6,63.98 115.98,63.08 116.24,62.05 116.4,60.81
  Top Layer region: 175.28,58.41 149,58.41 148.77,58.83 148.43,59.5 148.16,60.13 147.97,60.73 147.84,61.36 147.75,62.36 147.71,63.98 147.75,65.81 147.83,66.08 148,66.31 148.28,66.53 148.7,66.75 149.29,66.99 150.06,67.27 151.06,67.61 152.31,68.01 153.59,68.45 154.65,68.81 155.56,69.1 156.38,69.35 157.17,69.57 158,69.77 158.94,69.98 160.04,70.22 161.38,70.49 163.01,70.82 164.64,71.14 165.96,71.4 167.03,71.6 167.91,71.76 168.68,71.87 169.61,71.96 171.26,72.01 172.11,72.01 172.11,72.01 173.36,71.95 174.11,71.82 174.65,71.72 175.22,71.56 175.61,71.32
TSSOP-16 [mil]
  rect 71x16 smd: 1(-112,93) 2(-112,67) 3(-112,42) 4(-112,16) 5(-112,-10) 6(-112,-35) 7(-112,-61) 8(-112,-86) 9(116,-86) 10(116,-61) 11(116,-35) 12(116,-10) 13(116,16) 14(116,42) 15(116,67) 16(116,93)
  silkscreen extent -61,-103 65,110
WSON-8X6 [mm]
  rect 3.4x4.25 smd: 0(0,0)
  rect 1x0.45 smd: 1(-4,1.905) 2(-4,0.635) 3(-4,-0.635) 4(-4,-1.905) 5(4,-1.905) 6(4,-0.635) 7(4,0.635) 8(4,1.905)
  silkscreen extent -5.1,-3 4,3.05

## Via types
v1: diameter 24.4, hole 12, Top Layer to Bottom Layer, 123 vias